# Altium PCB PCB_DTN.PcbDoc
Units mil, origin at the board's own origin, x right, y up, seen from the top; angles counter-clockwise.
Board outline 3894.8 x 2248.08 mil, 2 copper layers (Top Layer, Bottom Layer); 25 components, 21 nets, 111 pads, 2 vias.
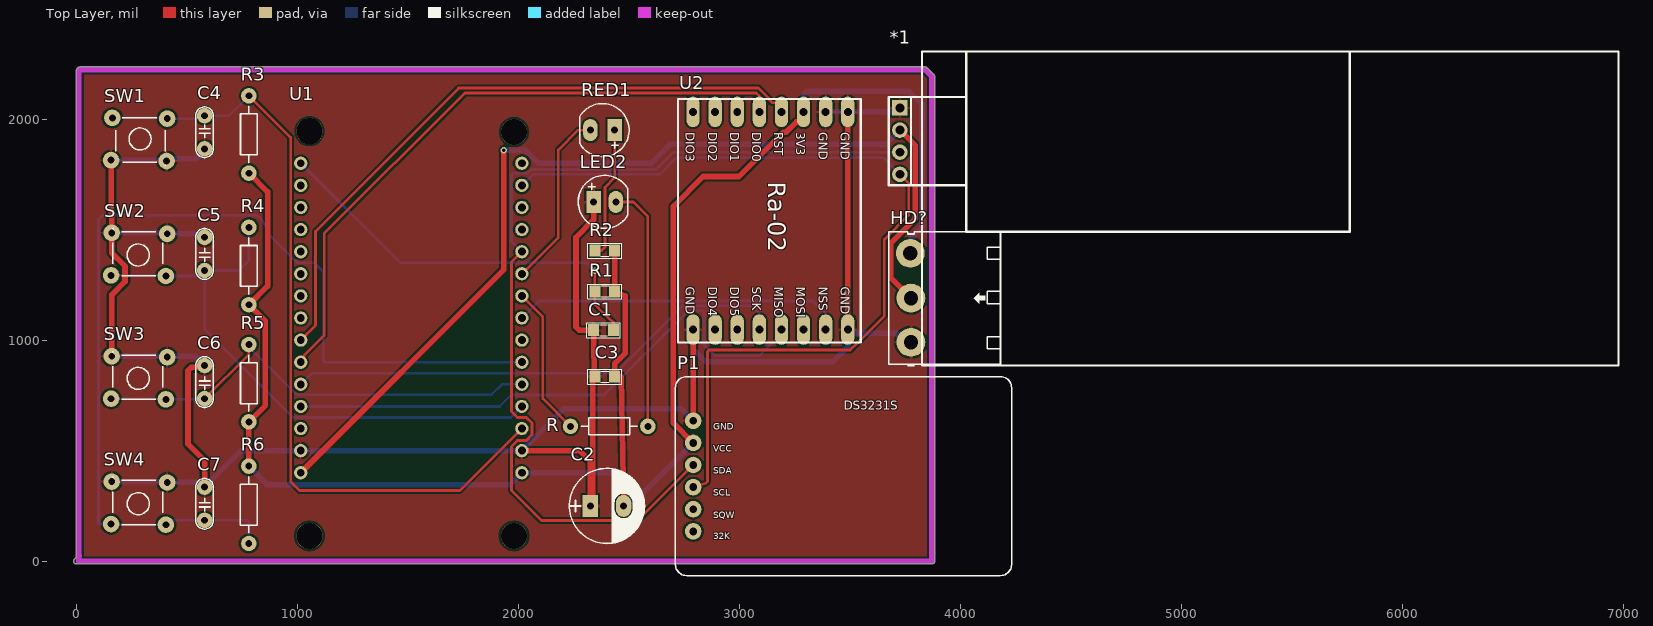
[diagram p0: Top Layer view]
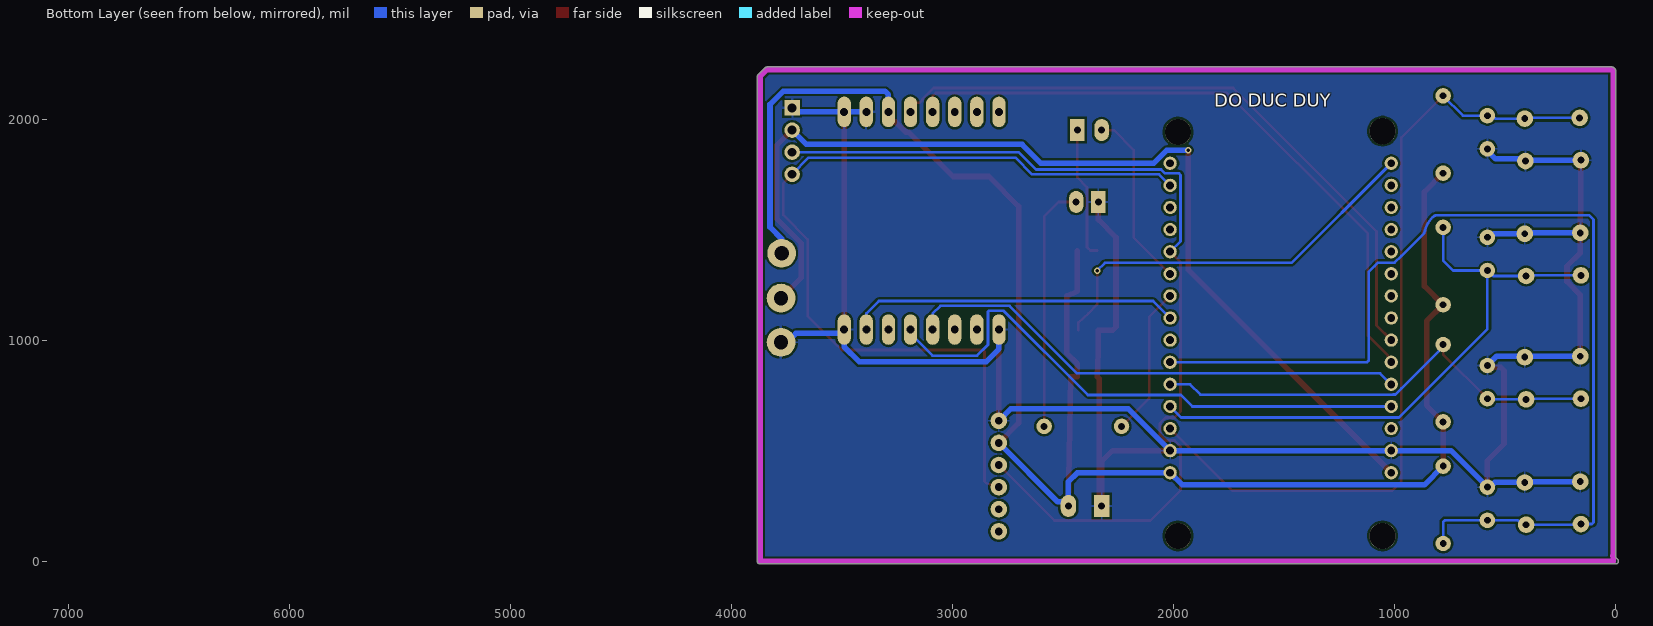
[diagram p1: Bottom Layer view, seen from below]

## Layer stack, top to bottom
Top Solder: solder mask 0.4, Solder Resist, Dk 3.5
Top Layer: signal copper 1.4
Dielectric 1: dielectric 12.6, FR-4, Dk 4.8
Bottom Layer: signal copper 1.4
Bottom Solder: solder mask 0.4, Solder Resist, Dk 3.5

## Board outline
-8.85,8.85 -0.76,16.94 -0.76,2218.14 cw(c11.75,2218.14) 2.93,2227.02 2.9,2226.99 7.81,2231.9 7.79,2231.87 cw(c16.66,2223.05) 16.66,2235.56 3838.16,2235.56 cw(c3838.16,2223.05) 3847.04,2231.87 3847.01,2231.9 3878.64,2200.27 3878.62,2200.29 cw(c3869.79,2191.42) 3882.31,2191.42 3882.31,0.45 cw(c3869.79,0.45) 3878.62,-8.43 3878.64,-8.4 3878.2,-8.85 3878.22,-8.82 cw(c3869.35,0) 3869.35,-12.51 0,-12.51 cw(c0,0)

## Design rules (kind name [scope] priority, off if disabled: settings)
Clearance [All] p1: gap=10 ignorepadtopadclearanceinfootprint=FALSE except(0: Arc-Hole Track-Hole SMDPad-Hole THPad-Hole Via-Hole Fill-Hole Poly-Hole Region-Hole Text-Hole)
PolygonConnect [All] p1: connectstyle=Relief reliefconductorwidth=10 reliefentries=4 polygonreliefangle="90 Angle" airgapwidth=10
RoomDefinition SCH_DTN [InComponentClass('SCH_DTN')] p1: confinementstyle=ConfineIn formatcopy=TRUE lockcomponents=FALSE outline 3930,65 7585,65 7585,3470 3930,3470
RoutingVias [All] p1: holewidth=16 width=30 viastyle="Through Hole" minholewidth=16 minwidth=30 maxholewidth=30 maxwidth=50
SolderMaskExpansion [All] p1: expansion=4 istentingtop=FALSE
Width Width_Power [InNetClass('Power')] p1: maxlimit=50 minlimit=15 preferedwidth=25
Width Width_Signal [All] p2: maxlimit=20 minlimit=10 preferedwidth=12
30 further rules are at their usual default settings.

## Classes and differential pairs
net class Power: 3V3 5V GND

## Components (designator, comment, footprint, x,y, rotation, side; value= is the part's Value field where it differs from the comment)
*1 "LCD_16x2_I2C" LCD_16x2_I2C 3570,1625 r0 top
C1 "10uF-16V" SM-0805 2385,1045 r0 top value=103
C2 "100uF/25V" CP1.5/3.4 2325,250 r0 top value=100uF/35V/50V
C3 "10uF-16V" SM-0805 2390,835 r0 top value=103
C4 "100nF/50V" CN1.5 580,2015 r270 top value=0.01uF
C5 "100nF/50V" CN1.5 580,1315 r90 top value=0.01uF
C6 "100nF/50V" CN1.5 580,735 r90 top value=0.01uF
C7 "100nF/50V" CN1.5 580,185 r90 top value=0.01uF
HD? "Header 3" HED3T 3775,990 r90 top
LED2 "LED" "LED-5 GRe" 2340,1625 r0 top value="LED 3 ly Single Colour"
P1 "DS3231S" "DS3231S - duplicate" 51220,35940 r180 top
R "10k (1/4W)" R1/4W 2235,610 r0 top value="R1/4W - 1K"
R1 "10K" SM-0805 2390,1220 r0 top value=1K
R2 "1K" SM-0805 2390,1405 r0 top
R3 "10k (1/4W)" R1/4W 780.49,1755 r90 top value="R1/4W - 1K"
R4 "10k (1/4W)" R1/4W 780.49,1160 r90 top value="R1/4W - 1K"
R5 "10k (1/4W)" R1/4W 780.49,630 r90 top value="R1/4W - 1K"
R6 "10k (1/4W)" R1/4W 780,430 r270 top value="R1/4W - 1K"
RED1 "LED" LED-5TRED 2380,1950 r180 top value="LED 3 ly Single Colour"
SW1 "SW" SW4 163,2005 r0 top value="SW chip 4 pin"
SW2 "SW" SW4 405,1290 r180 top value="SW chip 4 pin"
SW3 "SW" SW4 405,732 r180 top value="SW chip 4 pin"
SW4 "SW" SW4 405,165 r180 top value="SW chip 4 pin"
U1 "ESP32_DEVKIT1" ESP32_DEVKIT1 1513.89,1029.53 r0 top
U2 "RA-02" "LORA RA 02" 3195,1540 r270 top

## Footprints (in the part's own frame and the unit in brackets; to place one, negate y for a bottom-side part, rotate by r counter-clockwise, add the part's x,y. Pads: shape width x height; smd on the part's side, far side on the other; paste and mask are expansions set on the pad)
CN1.5 [mil]
  round 70 hole 31: 1(0,0) 2(150,0)
  silkscreen extent -40,-40 190,40, body extent -40,-33 190,33, height 235
CP1.5/3.4 [mil] "Tu hoa 220->470uF,16V, 470uF/16V,25V"
  rect 70x100 hole 32: 1(0,0)
  oval 70x100 hole 32: 2(150,0)
  silkscreen extent -95,-170 245,170, body extent -85,-157 230,157, height 446
"DS3231S - duplicate" [mil]
  round 74.8 hole 35.43 paste+0 mask+4: 1(48430,35305) 2(48430,35405) 3(48430,35505) 4(48430,35605) 5(48430,35705) 6(48430,35805)
  silkscreen extent 46990,35105 48510,36005, body extent 46971,35136 48480,35994, height 315
ESP32_DEVKIT1 [mil]
  round 60 hole 36 paste-99999 mask+2: 1(-498.89,770.47) 2(-498.89,670.47) 3(-498.89,570.47) 4(-498.89,470.47) 5(-498.89,370.47) 6(-498.89,270.47) 7(-498.89,170.47) 8(-498.89,70.47) 9(-498.89,-29.53) 10(-498.89,-129.53) 11(-498.89,-229.53) 12(-498.89,-329.53) 13(-498.89,-429.53) 14(-498.89,-529.53) 15(-498.89,-629.53) 16(501.11,-629.53) 17(501.11,-529.53) 18(501.11,-429.53) 19(501.11,-329.53) 20(501.11,-229.53) 21(501.11,-129.53) 22(501.11,-29.53) 23(501.11,70.47) 24(501.11,170.47) 25(501.11,270.47) 26(501.11,370.47) 27(501.11,470.47) 28(501.11,570.47) 29(501.11,670.47) 30(501.11,770.47)
  round 118.11 hole 118.11 unplated paste-99999: ""(-459.52,-915.35) ""(-459.52,915.36) ""(465.68,-915.35) ""(465.68,911.42)
  body extent -559,-1014 555,1024, height 185
HED3T [mil] "Header 3, 3 pin, hight 300mil, Pin to Pin 200, Colour Green"
  round 130 hole 65: 1(0,0) 2(200,0) 3(402.62,2.62)
  silkscreen extent -105,-405 500,100, body extent -95,-404 496,68, height 124
LCD_16x2_I2C [mil]
  rect 70x70 hole 40: 1(155,425)
  round 70 hole 40: 2(155,325) 3(155,225) 4(155,125)
  silkscreen extent 105,-740 3405,680, body extent 105,-737 3403,680, height 641
"LED-5 GRe" [mil] "LED 2 PIN, 5 ly , Only colour,pin to pin 100mil"
  rect 65x100 hole 32: 1(0,0)
  oval 65x100 hole 32: 2(100,0)
  silkscreen extent -70,-120 154,120, body extent -54,-104 154,105, height 337
LED-5TRED [mil] "LED 2 PIN, 5 ly , Only colour, pin to pin 110mil"
  rect 65x100 hole 32: 1(-55,0)
  oval 65x100 hole 32: 2(55,0)
  silkscreen extent -120,-120 104,120, body extent -116,-117 98,120, height 339
"LORA RA 02" [mil]
  oval 137.79x60 hole 36 paste+0 mask+4: 1(-492.13,294.33) 2(-492.13,194.33) 3(-492.13,94.33) 4(-492.13,-5.67) 5(-492.13,-105.67) 6(-492.13,-205.67) 7(-492.13,-305.67) 8(-492.13,-405.67) 9(492.12,294.33) 10(492.12,194.33) 11(492.12,94.33) 12(492.12,-5.67) 13(492.12,-105.67) 14(492.12,-205.67) 15(492.12,-305.67) 16(492.12,-405.67)
  silkscreen extent -551,-473 551,353, body extent -553,-460 535,347, height 232
R1/4W [mil] "R 1/4W, 2 Pin, 350mil"
  round 70 hole 31: 1(0,0) 2(350,0)
  silkscreen extent 48,-38 302,38, body extent -40,-47 386,47, height 111
SM-0805 [mil] "Compoment SMD 80x50mil"
  rect 50x55 smd: 1(-45,0) 2(45,0)
  silkscreen extent -77,-34 76,33, body extent -40,-27 40,23, height 24
SW4 [mil] "SW button 4pin, 250 x250 mil"
  round 75 hole 31: 1(0,0) 2(245,-195) 3(248,-3) 4(-6,-191)
  silkscreen extent 15,-215 240,0, body extent -36,-220 276,24, height 276

## Part data
C1 C3: library part CM, "Cap SMD"
C2: library part CP3, "Cap 100uF/35V - 470uF/16V", Description 1="1000uF/6,3V - 470uF/16V - 330uF - 25V", Description 2="220uF/35V - 100uF/50V - 63V - 4,7uF/200V", Description 3="22uF => 33uF100V - 3,3uF => 4,7uF/250V", Description 4="2,2uF =>3,3uF/350 - 2,2uF/400V - 1uF/450V"
C4 C5 C6 C7: library part CN1.5, "Cap np 682pF => 104pF"
HD?: library part Hed3, "Header 3 (Green)"
LED2 RED1: "LED Single colour Green and Red"
R R3 R4 R5 R6: library part R1/4W, "Resistor 1/4W"
R1 R2: library part RM, "Resistor SMD"
SW1 SW2 SW3 SW4: library part SW4-1, "Switch button 4 pin"

## Via types
v1: diameter 30, hole 16, Top Layer to Bottom Layer, 2 vias

## Nets (pads, with @x,y where several pads share a name; then routed paths per layer and width w, separated by ;. In a path a pad name is that pad's centre, name@x,y a point inside that pad or via, vN(x,y) a via of type N, cw(c..) or ccw(c..) an arc to the next point about the centre after c; other vN are vias at no path point)
3V3: C2.2 C3.2 HD?.3 P1.2 R1.2 R2.2 R3.1 R4.1 R5.1 R6.1 U1.16 U2.3 | length 8236.8
  Top Layer w25: R6.1 780,529 780.49,529.49 R5.1 855,704.51 855,1085.49 R4.1 865,1244.51 865,1670.49 R3.1 ; R2.2 R1.2 2482,1200 2482,940 2435,893 C3.2 2465,835 C2.2 ; P1.2 2700,625 2700,1605 2835,1740 2997.2,1740 3197.93,1940.73 3211.07,1940.73 3256.88,1986.53 3273.16,1986.53 3289.33,2002.7 U2.3
  Bottom Layer w25: R6.1 865,345 1960,345 U1.16 2435,400 2475,360 C2.2 2493.77,268.77 2523.77,268.77 P1.2 ; U2.3 3289.33,2110.65 3305,2126.33 3764.67,2126.33 3825,2066 3825,1511 3772.38,1458.38 HD?.3
5V: *1.2 HD?.2 U1.15 | length 4588.2
  Top Layer w25: U1.15 1934,1319 v1(1934,1859) ; *1.2 3793.5,1881.5 3793.5,1548.5 3684,1439 3684,1281 HD?.2
  Bottom Layer w25: v1(1934,1859) 2030.24,1859 2088.74,1800.5 2600.5,1800.5 2685,1885 3660,1885 *1.2
GND: *1.1 C1.1 C2.1 C3.1 C4.2 C5.2 C6.2 C7.2 HD?.1 LED2.1 P1.1 SW1.2 SW1.4 SW2.2 SW2.4 SW3.2 SW3.4 SW4.2 SW4.4 U1.14 U1.17 U2.1 U2.2 U2.9 U2.16 | length 10693.7
  Top Layer w25: SW1.4 157,1653 SW2.2 160,1395 220,1335 220,1265 160,1205 SW3.2 ; C7.2 580,455.26 505,530.26 505,861.74 519.64,876.39 571.39,876.39 C6.2 ; U1.17 2275,500 2325,450 C2.1 2335,260 2335,450 2335,825 C3.1 2340,945 C1.1 2274.64,1045 2260,1059.64 2260,1465 2340,1545 LED2.1 ; U2.16 2789.33,841.67 2790,841 P1.1 ; U2.9 U2.1
  Bottom Layer w25: SW1.4 404,1814 SW1.2 417.57,1819.57 447.21,1819.57 447.64,1820 543.18,1820 580,1856.82 C4.2 ; SW4.2 407,360 SW4.4 546.82,356 567.82,335 C7.2 745,500 U1.14 U1.17 2205,690 2735,690 P1.1 ; SW3.2 538,927 C6.2 ; SW2.2 407,1485 SW2.4 551.82,1481 567.82,1465 C5.2 ; U2.16 2789.33,960 2847.83,901.5 3420.83,901.5 3489.33,970 U2.9 ; U2.2 3707.13,2032.13 *1.1 ; U2.9@3489.33,1046.17 3505.49,1030 3707.86,1030 3747.86,990 HD?.1
"I2C SCL": *1.4 P1.4 U1.29 | length 4020.8
  Top Layer w12: P1.4 2846.46,351.98 2855,360.53 2855,947.97 2862.03,955 3500.4,955 3535.33,989.92 3655,1109.6 3655,1455 3765,1565 3765,1710 *1.4
  Bottom Layer w12: U1.29 2065,1750 2640,1750 2715,1825 3650,1825 *1.4
"I2C SDA": *1.3 P1.3 U1.26 | length 4371.8
  Top Layer w12: U1.26 1968,1353 1968,677 1995,650 2035,650 2061,624 2061,572 2035,546 1995,546 1968,519 1968,320 2104,184 2539,184 P1.3
  Bottom Layer w12: U1.26 1968,1447 1968,1746.97 1975.03,1754 2037.88,1754 2055.89,1772 2622,1772 2700,1850 *1.3
"LORA DIO0": U1.10 U2.5 | length 2934.6
  Top Layer w12: U1.10 1015,912.99 1029.44,927.43 1029.44,929.44 1121.15,1021.15 1121.15,1481.15 1758,2118 3075,2118 3089.33,2103.67 U2.5
"LORA MIOS": U1.13
"LORA MISO": U1.12 U2.12 | length 2585
  Bottom Layer w12: U1.12 1915,700 1967,752 2387,752 2767.78,1132.78 2835,1132.78 2839,1128.78 2839,978.98 2887.98,930 3090.02,930 3189.33,1029.3 U2.12
"LORA MOSI": U2.11
"LORA NSS": U1.23 U2.10 | length 1501.8
  Bottom Layer w12: U1.23 2091.78,1176.78 3332.55,1176.78 3389.33,1120 U2.10
"LORA RESET": U1.9 U2.4 | length 2953.5
  Top Layer w12: U1.9 1082,1067 1082,1492 1727.94,2137.94 1730,2140 3085.4,2140 3135.33,2090.08 3135.33,2086.13 3148.36,2073.1 3167.15,2073.1 3189.33,2050.92 U2.4
"LORA SCK": U1.11 U2.13 | length 2307.8
  Bottom Layer w12: U1.11 1065,850 2436.78,850 2741.55,1154.78 3054.55,1154.78 3089.33,1120 U2.13
NetC1_2: C1.2 R1.1 U1.1 | length 1837.1
  Top Layer w12: v1(2345,1314) R1.1 2345,1160 2385,1120 2430,1080 C1.2
  Bottom Layer w12: U1.1 1465.68,1349.31 2309.69,1349.31 v1(2345,1314)
NetLED2_2: LED2.2 R.2 | length 1121.9
  Top Layer w12: LED2.2 2520,1625 2585,1560 R.2
NetR2_1: R2.1 RED1.1 | length 600.4
  Top Layer w12: R2.1 2376,1405 2391,1420 2391,1691 2435,1735 RED1.1
NetR_1: R.1 U1.24 | length 681.1
  Top Layer w12: U1.24 2110,1105 2110,735 R.1
NetRED1_2: RED1.2 U1.25 | length 810.6
  Top Layer w12: U1.25 2180,1465 2180,1860 2270,1950 RED1.2
SW1: C4.1 R3.2 SW1.1 SW1.3 U1.18 | length 3647.3
  Top Layer w12: R3.2 969,1916.49 969,360 1009,320 1735,320 U1.18
  Bottom Layer w12: SW1.1 408,2005 SW1.3 543.97,2002 545.87,2003.9 C4.1@568.9,2003.9 ; C4.1 690.49,2015 R3.2
SW2: C5.1 R4.2 SW2.1 SW2.3 U1.19 | length 2690.1
  Bottom Layer w12: SW2.3 402,1293 SW2.1 555,1290 C5.1 ; R4.2 780.49,1360 735.49,1315 C5.1 ; U1.19 1965,650 980.03,650 580,1050.03 C5.1
SW3: C6.1 R5.2 SW3.1 SW3.3 U1.20 | length 2107.7
  Top Layer w12: C6.1 780.49,935.49 R5.2
  Bottom Layer w12: SW3.3 402,735 SW3.1 577,732 C6.1 ; R5.2 780.49,969.55 969,781.04 969,780.94 995.95,754 1006.49,754 1007.49,753 1878,753 1925,800 U1.20
SW4: C7.1 R6.2 SW4.1 SW4.3 U1.21 | length 4590.2
  Bottom Layer w12: SW4.3 107.03,168 100,175.03 100,1544.96 120.04,1565 808.77,1565 cw(c808.77,1553) 811.44,1564.7 cw(c803.79,1531.55) 827.83,1555.62 cw(c732.46,1460.23) 865.08,1484.86 867.65,1482.29 969.02,1380.92 999.95,1350 1075,1350 1090,1335 1090,1334.95 1117.18,1307.76 1117.18,907.03 1124.21,900 U1.21 ; SW4.3@160,165 SW4.1 422.05,165 442.05,185 C7.1@564.31,185 ; C7.1 772.97,185 780,177.97 R6.2
pads on no net: P1.5 P1.6 U1. U1.2 U1.3 U1.4 U1.5 U1.6 U1.7 U1.8 U1.22 U1.27 U1.28 U1.30 U2.6 U2.7 U2.8 U2.14 U2.15

## Polygon pours and split planes (outlines as drawn)
GND on Top Layer "GND_L01_P000" (solid, remove dead copper, pour order 0): 0,0 0.88,-0.88 3872.37,-0.88 3872.37,2215.83 3865.95,2222.25 3865.8,2222.11 13.23,2222.11 13.23,12.63 0.12,-0.49
GND on Bottom Layer "GND_L02_P001" (solid, remove dead copper, pour order 1): 12.88,1.33 3869.86,1.33 3869.97,1.44 3868.02,3.39 3868.02,2223.92 16.76,2223.92 13.55,2220.71 13.55,2.33

## Keep-outs
Keep-Out Layer:
  lines w25: 12.94,25.56 11.75,26.75 ; 11.75,26.75 11.75,11.75 11.75,0 3869.35,0 3869.79,0.45 3869.79,2191.42 3838.16,2223.05 16.66,2223.05 11.75,2218.14 11.75,26.75

## Silkscreen, mask and mechanical layers (free items; w line width, h text height)
Bottom Overlay:
  text "DO DUC DUY" at 1815,2055 h60

## Text inside footprints (layer, text, board x,y; h text height)
P1: Top Overlay "SDA" at 2880.06,395.03 h30; Top Overlay "SCL" at 2880.06,295.03 h30; Top Overlay "VCC" at 2880.06,495.03 h30; Top Overlay "GND" at 2880.06,595.03 h30; Top Overlay "SQW" at 2880.06,195.03 h30; Top Overlay "32K" at 2880.04,100 h30
U2: Top Overlay "Ra-02" at 3130.14,1717.18 h80 r270; Top Overlay "GND" at 3457.24,1941.23 h39.37 r270; Top Overlay "GND" at 2757.24,1241.24 h39.37 r270; Top Overlay "GND" at 3457.24,1241.24 h39.37 r270; Top Overlay "GND" at 3357.24,1941.23 h39.37 r270; Top Overlay "3V3" at 3257.27,1941.13 h39.37 r270; Top Overlay "RST" at 3157.24,1941.23 h39.37 r270; Top Overlay "MOSI" at 3257.24,1241.24 h39.37 r270; Top Overlay "NSS" at 3357.24,1241.24 h39.37 r270; Top Overlay "MISO" at 3157.24,1241.24 h39.37 r270; Top Overlay "SCK" at 3057.24,1241.24 h39.37 r270; Top Overlay "DIO5" at 2957.24,1241.24 h39.37 r270; Top Overlay "DIO4" at 2857.24,1241.24 h39.37 r270; Top Overlay "DIO0" at 3057.24,1941.23 h39.37 r270; Top Overlay "DIO1" at 2957.24,1941.23 h39.37 r270; Top Overlay "DIO2" at 2857.24,1941.23 h39.37 r270; Top Overlay "DIO3" at 2757.24,1941.24 h39.37 r270